# Altium PCB PCB Módulo Gasolina.PcbDoc
Units mm, origin at the board's own origin, x right, y up, seen from the top; angles counter-clockwise.
Board outline 19.15 x 81.74 mm, 2 copper layers (Top Layer, Bottom Layer); 54 components, 26 nets, 167 pads, 29 vias.
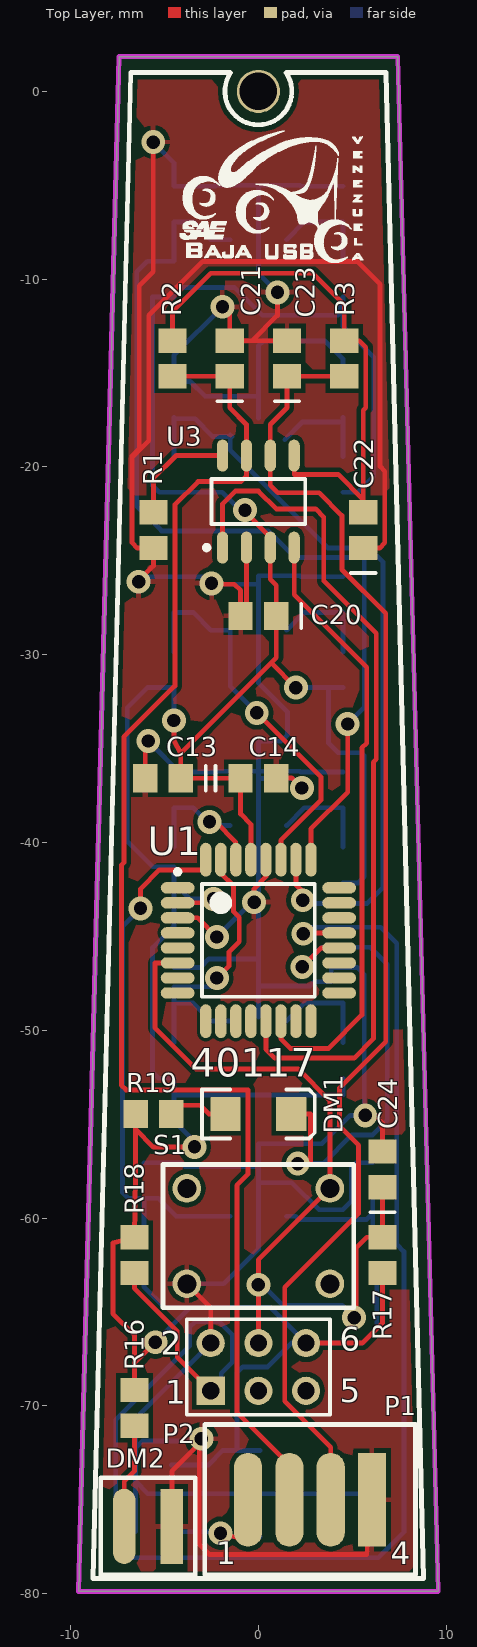
[diagram p0: Top Layer view]
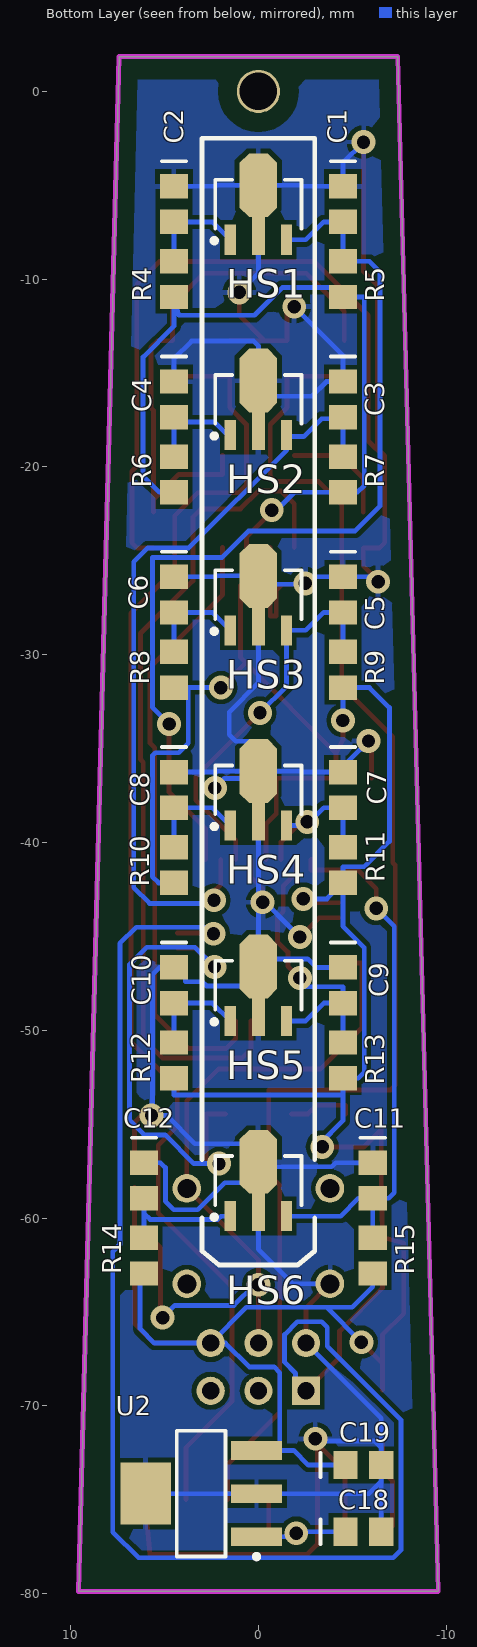
[diagram p1: Bottom Layer view, seen from below]

## Layer stack, top to bottom
Top Layer: signal copper 0.0356
Dielectric: dielectric 0.32, FR-4, Dk 4.8
Bottom Layer: signal copper 0.0356

## Board outline
-9.576,-79.883 9.576,-79.883 7.417,1.854 -7.417,1.854

## Design rules (kind name [scope] priority, off if disabled: settings)
Clearance "Clearance Micro" [(HasFootprint('873-01_M'))] p1: gap=0.178
Clearance [All] p2: gap=0.254
PolygonConnect [All] p1: connectstyle=Relief reliefconductorwidth=0.254 reliefentries=4 polygonreliefangle="90 Angle"
RoutingVias [All] p1: holewidth=0.711 width=1.27 viastyle="Through Hole" minholewidth=0.711 minwidth=1.27 maxholewidth=0.711 maxwidth=1.27
SilkscreenOverComponentPads [All] p1: minsilkscreentomaskgap=0.178
SolderMaskExpansion [All] p1: expansion=0.102
Width [All] p1: maxlimit=0.254 minlimit=0.254 preferedwidth=0.254
27 further rules are at their usual default settings.

## Components (designator, comment, footprint, x,y, rotation, side; value= is the part's Value field where it differs from the comment)
C1 "Cap Semi" C0805 -4.5,-6 r270 bottom
C2 "Cap Semi" C0805 4.5,-6 r270 bottom
C3 "Cap Semi" C0805 -4.5,-16.4 r270 bottom
C4 "Cap Semi" C0805 4.5,-16.4 r270 bottom
C5 "Cap Semi" C0805 -4.5,-26.8 r270 bottom
C6 "Cap Semi" C0805 4.5,-26.8 r270 bottom
C7 "Cap Semi" C0805 -4.5,-37.2 r270 bottom
C8 "Cap Semi" C0805 4.5,-37.2 r270 bottom
C9 "Cap Semi" C0805 -4.5,-47.6 r270 bottom
C10 "Cap Semi" C0805 4.5,-47.6 r270 bottom
C11 "Cap Semi" C0805 -6.092,-58 r270 bottom
C12 "Cap Semi" C0805 6.092,-58 r270 bottom
C13 "Cap Pol3" C0805 -5.08,-36.576 r180 top
C14 "Cap Pol3" C0805 0,-36.576 r0 top
C18 "Cap Pol3" C0805 -5.588,-76.708 r180 bottom
C19 "Cap Pol3" C0805 -5.588,-73.152 r180 bottom
C20 "Cap Pol3" C0805 0,-27.94 r180 top
C21 "Cap Pol3" C0805 -1.524,-14.224 r90 top
C22 "Cap Pol3" C0805 5.588,-23.368 r90 top
C23 "Cap Pol3" C0805 1.524,-14.224 r90 top
C24 "Cap Pol3" C0805 6.604,-57.404 r90 top
DM1 "LED2" "LED SMD" 0,-54.356 r180 top
DM2 "LED2" "SMD pads LED" -5.876,-76.416 r0 top
HS1 "Component_1" SOT89M 0,-6 r90 bottom
HS2 "Component_1" SOT89M 0,-16.4 r90 bottom
HS3 "Component_1" SOT89M 0,-26.8 r90 bottom
HS4 "Component_1" SOT89M 0,-37.2 r90 bottom
HS5 "Component_1" SOT89M 0,-47.6 r90 bottom
HS6 "Component_1" SOT89M 0,-58 r90 bottom
P1 "Header 4" "CONECTOR CABLES 4" 7.15,-75 r0 top
P2 "Header 3X2" "HDR2X3 mod" -2.54,-69.2 r0 top
R1 "Res Semi" 2012[0805] -5.588,-23.368 r90 top
R2 "Res Semi" 2012[0805] -4.572,-14.224 r270 top
R3 "Res Semi" 2012[0805] 4.572,-14.224 r90 top
R4 "Res Semi" 2012[0805] 4.5,-10 r270 bottom
R5 "Res Semi" 2012[0805] -4.5,-10 r270 bottom
R6 "Res Semi" 2012[0805] 4.5,-20.4 r270 bottom
R7 "Res Semi" 2012[0805] -4.5,-20.4 r270 bottom
R8 "Res Semi" 2012[0805] 4.5,-30.8 r270 bottom
R9 "Res Semi" 2012[0805] -4.5,-30.8 r270 bottom
R10 "Res Semi" 2012[0805] 4.5,-41.2 r270 bottom
R11 "Res Semi" 2012[0805] -4.5,-41.2 r270 bottom
R12 "Res Semi" 2012[0805] 4.5,-51.6 r270 bottom
R13 "Res Semi" 2012[0805] -4.5,-51.6 r270 bottom
R14 "Res Semi" 2012[0805] 6.092,-62 r270 bottom
R15 "Res Semi" 2012[0805] -6.092,-62 r270 bottom
R16 "Res Semi" 2012[0805] -6.604,-70.104 r270 top
R17 "Res Semi" 2012[0805] 6.604,-61.976 r270 top
R18 "Res Semi" 2012[0805] -6.604,-61.976 r90 top
R19 "Res Semi" 2012[0805] -5.588,-54.456 r180 top
S1 "SW-PB" Boton -3.81,-58.42 r0 top
U1 "MC9S08DZ60_32" 873-01_M 0,-45.212 r0 top
U2 "MIC2954-03WS TR" SOT223-4M 3.048,-74.676 r0 bottom
U3 "TJA1040" SOT96-1_L 0,-21.844 r90 top

## Footprints (in the part's own frame and the unit in brackets; to place one, negate y for a bottom-side part, rotate by r counter-clockwise, add the part's x,y. Pads: shape width x height; smd on the part's side, far side on the other; paste and mask are expansions set on the pad)
873-01_M [mm]
  oval 1.8x0.6 smd: 1(-4.3,2.8) 2(-4.3,2) 3(-4.3,1.2) 4(-4.3,0.4) 5(-4.3,-0.4) 6(-4.3,-1.2) 7(-4.3,-2) 8(-4.3,-2.8) 17(4.3,-2.8) 18(4.3,-2) 19(4.3,-1.2) 20(4.3,-0.4) 21(4.3,0.4) 22(4.3,1.2) 23(4.3,2) 24(4.3,2.8)
  oval 0.6x1.8 smd: 9(-2.8,-4.3) 10(-2,-4.3) 11(-1.2,-4.3) 12(-0.4,-4.3) 13(0.4,-4.3) 14(1.2,-4.3) 15(2,-4.3) 16(2.8,-4.3) 25(2.8,4.3) 26(2,4.3) 27(1.2,4.3) 28(0.4,4.3) 29(-0.4,4.3) 30(-1.2,4.3) 31(-2,4.3) 32(-2.8,4.3)
  silkscreen extent -4.42,-3 3,3.77, body extent -3.51,-3.51 3.51,3.51, height 1.6
2012[0805] [mm]
  rect 1.3x1.5 smd: 1(-0.95,0) 2(0.95,0)
Boton [mil]
  round 60 hole 40: 0(0,0) 1(300,0) 2(0,-200) 3(300,-200)
  silkscreen extent -50,-250 350,50
C0805 [mm]
  rect 1.3x1.5 smd: 1(-0.95,0) 2(0.95,0)
  silkscreen extent -2.28,-0.65 -2.28,0.65
"CONECTOR CABLES 4" [mm] "Conector de 4 pads para cables que salen del módulo"
  oval 1.5x5 smd: 1(-7.7,0) 2(-5.5,0) 3(-3.3,0)
  rect 1.5x5 smd: 4(-1.1,0)
  silkscreen extent -10,-4 1.22,4
"HDR2X3 mod" [mm]
  rect 1.5x1.5 hole 0.914: 1(0,0)
  round 1.5 hole 0.914: 2(0,2.54) 3(2.54,0) 4(2.54,2.54) 5(5.08,0) 6(5.08,2.54)
  silkscreen extent -1.27,-1.27 6.35,3.81
"LED SMD" [mm] "5.0x1.5mm"
  rect 1.6x1.8 smd: 1(1.75,0.1) 2(-1.75,0.1)
  silkscreen extent -3,-1.2 3,1.4
"SMD pads LED" [mm] "Pads SMD para un LED trough-hole"
  oval 1.2x4 smd: 1(-1.27,0)
  rect 1.2x4 smd: 2(1.27,0)
  silkscreen extent -2.51,-2.59 2.51,2.59
SOT89M [mm] "SOT89, 3-Leads, Body 4.5x2.4 mm, Pitch 1.5mm, Lead Span 4.1mm, IPC Low Density"
  rect 1.6x0.6 smd: 1(-1.9,1.5) 3(-1.9,-1.5)
  rect 2x0.7 smd: 2(-1.7,0)
  oct 3.4x2 smd: 2(1,0)
  silkscreen extent -2.07,-2.3 1.3,2.48, body extent -1.3,-2.3 1.3,2.3, height 1.6
SOT96-1_L [mm]
  oval 1.7x0.6 smd: 1(-2.45,1.905) 2(-2.45,0.635) 3(-2.45,-0.635) 4(-2.45,-1.905) 5(2.45,-1.905) 6(2.45,-0.635) 7(2.45,0.635) 8(2.45,1.905)
  silkscreen extent -2.57,-2.5 1.2,2.88, body extent -2,-2.5 2,2.5, height 1.75
SOT223-4M [mm] "SOT223, 4-Leads, Body 6.5x3.5mm, Pitch 2.3mm, Lead Span 7mm, IPC Low Density"
  rect 2.7x1 smd: 1(-2.95,2.3) 2(-2.95,0) 3(-2.95,-2.3)
  rect 2.7x3.3 smd: 4(2.95,0)
  silkscreen extent -3.07,-3.35 1.3,3.47, body extent -1.85,-3.35 1.85,3.35, height 1.8

## Part data
C1 C2 C3 C4 C5 C6 C7 C8 C9 C10 C11 C12: "Capacitor (Semiconductor SIM Model)"
C13 C14 C18 C19 C20 C21 C22 C23 C24: "Polarized Capacitor (Surface Mount)"
DM1 DM2: "Typical RED, GREEN, YELLOW, AMBER GaAs LED"
P1: "Header, 4-Pin"
P2: "Header, 3-Pin, Dual row"
R1 R2 R3 R4 R5 R6 R7 R8 R9 R10 R11 R12 R13 R14 R15 R16 R17 R18 R19: "Semiconductor Resistor"
S1: "Switch"
U2: library part Component_1_1

## Free pads (board coordinates)
  round 2.3 hole 2: 1(0,0)

## Via types
v1: diameter 1.27, hole 0.711, Top Layer to Bottom Layer, 29 vias

## Nets (pads, with @x,y where several pads share a name; then routed paths per layer and width w, separated by ;. In a path a pad name is that pad's centre, name@x,y a point inside that pad or via, vN(x,y) a via of type N, cw(c..) or ccw(c..) an arc to the next point about the centre after c; other vN are vias at no path point)
+5V: C13.1 C14.1 C19.1 C20.1 P2.6 R4.2 R5.2 R6.2 R7.2 R8.2 R9.2 R10.2 R11.2 R12.2 R13.2 R14.2 R15.2 R16.1 R17.2 R18.2 R19.2 U1.2 U1.29 U2.3 U3.3 | length 192.8
  Top Layer w0.254: R16.1 -6.604,-66.224 -7.743,-65.085 -7.743,-61.331 R18.2 -6.538,-57.73 -6.538,-55.281 ; -6.604,-67.731 v1(-5.482,-66.609) ; R19.2 -6.538,-55.281 ; v1(-4.5,-33.5) -4.5,-34.543 -4.13,-35.24 ; U1.2 -2.597,-43.212 v1(-2.388,-43.002) ; v1(-3.404,-56.21) -3.105,-56.21 -3.255,-56.061 -3.414,-56.221 -5.598,-56.221 -6.538,-55.281 ; v1@-0.885,-22.617 -0.885,-22.388 -0.798,-22.301 v1(-0.711,-22.301) ; v1@-0.755,-22.345 0.635,-23.734 U3.3 0.635,-25.985 0.95,-26.3 C20.1 0.95,-30.16 0.678,-30.432 ; U1.29 -0.4,-39.025 -0.95,-38.475 C14.1 -2.561,-36.576 C13.1 -4.13,-35.24 ; v1(1.996,-31.75) 0.678,-30.432 ; P2.6 5.537,-66.66 6.604,-65.593 R17.2 ; -4.13,-35.24 0.678,-30.432
  Bottom Layer w0.254: R15.2 -6.092,-63.663 -5,-64.755 -3.628,-64.755 ; v1(-5.482,-66.609) -3.628,-64.755 ; C19.1 -2.663,-73.152 -1.887,-72.376 U2.3@-1.139,-72.376 ; -4.5,-53.452 4.5,-53.452 R12.2 ; v1(-4.5,-33.5) R9.2 -5.914,-31.75 -6.981,-32.817 -6.981,-39.939 -5.635,-41.286 -4.5,-41.286 R11.2 ; v1(-3.404,-56.21) -3.255,-56.061 -4.5,-54.816 R13.2 -5.318,-52.55 -5.635,-52.233 -5.635,-45.597 -4.5,-44.462 R11.2 ; v1(-2.388,-43.002) -3.648,-43.002 R11.2 ; v1(-0.711,-22.301) -0.798,-22.301 -0.885,-22.388 -1.923,-21.35 R7.2 -5.276,-21.35 -5.635,-20.991 -5.635,-10.95 R5.2 -4.5,-10.45 -1.266,-10.45 0.207,-11.923 4.246,-11.923 R4.2 4.5,-12.508 6.139,-14.147 6.139,-20.495 5.284,-21.35 R6.2 ; U2.3 U2.3@-1.139,-72.376 ; v1(1.996,-31.75) 3.738,-31.75 ; R10.2 5.312,-42.15 5.643,-41.819 5.643,-35.367 5.49,-35.215 4.246,-35.215 3.738,-34.707 3.738,-31.75 ; R8.2 3.738,-31.75 ; R14.2@6.3,-63.158 6.3,-65.9 5.54,-66.66 P2.6 ; -3.628,-64.755 0.635,-64.755 P2.6 ; U2.3@-1.139,-72.376 -1.139,-68.235 -0.834,-67.93 0.487,-67.93 1.757,-66.66 P2.6
+12V: C18.1 P1.1 U2.1 | length 10.7
  Top Layer w0.254: v1(-2.015,-76.782) -1.095,-77.029 -0.55,-77.176 P1.1
  Bottom Layer w0.254: C18.1 -2.409,-76.708 -2.175,-76.942 -2.141,-76.976 -2.015,-76.976 -1.294,-76.976 ; v1(-2.015,-76.782) -1.294,-76.976 ; -1.294,-76.976 U2.1 -1.294,-76.976
BKGD: P2.1 R18.1 U1.21 | length 84.2
  Top Layer w0.254: R18.1 -6.604,-63.736 -4.324,-66.016 -4.324,-67.416 P2.1 ; v1@2.388,-45.212 2.388,-44.806 2.458,-44.735 2.534,-44.735 2.667,-44.602 2.667,-44.515 2.671,-44.511 2.671,-44.812 U1.21
  Bottom Layer w0.254: P2.1 -1.977,-69.2 -1.977,-68.26 -1.393,-67.676 -1.393,-66.203 -2.079,-65.517 -3.374,-65.517 -3.671,-65.814 -3.671,-66.83 -7.591,-70.75 -7.591,-77.684 -7.184,-78.09 6.379,-78.09 7.751,-76.719 7.751,-61.783 7.37,-61.402 7.37,-45.375 6.506,-44.511 2.671,-44.511 2.667,-44.515 2.667,-44.602 2.534,-44.735 2.458,-44.735 2.388,-44.806 v1@2.388,-45.212
  other v1: 2.388,-44.856
CANHIGH: C21.1 P1.2 R2.2 U3.7 | length 75.3
  Top Layer w0.254: R2.2 -3.069,-15.174 C21.1 -1.524,-16.851 -0.635,-17.74 U3.7 -0.635,-20.483 -0.929,-20.777 -3.211,-20.777 -4.441,-22.007 -4.441,-31.659 -7.159,-34.377 -7.159,-41.068 -7.292,-41.201 -7.292,-52.925 -7.044,-53.173 -0.555,-53.173 -0.555,-57.669 -1.139,-58.253 -1.139,-70.343 1.65,-73.132 P1.2
CANLOW: C23.1 P1.3 R3.1 U3.6 | length 71.2
  Top Layer w0.254: P1.3 3.85,-72.208 1.401,-69.759 1.401,-63.688 5.338,-59.751 5.338,-56.119 4.322,-55.103 4.322,-53.071 6.786,-50.607 6.786,-27.798 4.449,-25.461 4.449,-22.591 3.23,-21.372 1.041,-21.372 0.635,-20.966 U3.6 0.635,-17.74 1.524,-16.851 C23.1 R3.1
GND: C1.1 C2.1 C3.1 C4.1 C5.1 C6.1 C7.1 C8.1 C9.1 C10.1 C11.1 C12.1 C13.2 C14.2 C18.2 C19.2 C20.2 C21.2 C22.1 C23.2 C24.2 DM2.2 HS1.2 HS2.2 HS3.2 HS4.2 HS5.2 HS6.2 P1.4 P2.2 R1.1 S1.2 U1.3 U1.28 U2.2 U2.4 U3.2 | length 285.6
  Top Layer w0.254: v1(-6.375,-26.111) -6.375,-26.057 -5.588,-25.27 R1.1 -6.448,-24.318 -6.727,-24.039 -6.727,-19.492 ; C13.2 -6.03,-35.102 -5.867,-34.939 v1(-5.867,-34.595) ; v1(-5.6,-2.7) -5.6,-9.602 -6.346,-10.348 -6.346,-19.035 -6.727,-19.416 -6.727,-19.492 ; DM2.2 -4.606,-73.48 v1@-3.147,-72.021 ; U1.3 -3.232,-44.012 v1(-2.21,-45.034) ; S1.2 -2.54,-64.77 P2.2 ; v1(-3.035,-71.755) -3.147,-71.867 v1@-3.147,-72.021 ; v1@-2.5,-26.249 -1.28,-26.249 -0.95,-26.579 C20.2 -0.64,-27.94 -0.635,-27.935 U3.2 ; v1(-1.909,-11.466) -1.524,-11.851 C21.2 -0.326,-13.274 ; v1@-0.229,-42.806 v1(-0.229,-43.18) -0.229,-42.458 0.4,-41.829 U1.28 ; C14.2 0.95,-36.561 1.782,-36.561 v1(2.315,-37.095) ; v1(1.016,-10.704) 1.016,-11.932 -0.326,-13.274 ; C23.2 -0.326,-13.274 ; C22.1 6.456,-24.318 6.735,-24.039 6.735,-20.229 6.481,-19.975 6.481,-10.272 5.262,-9.053 -2.968,-9.053 -5.838,-11.923 -5.838,-18.603 -6.727,-19.492 ; v1(5.69,-54.534) 5.69,-54.167 6.056,-54.534 6.216,-54.534 6.604,-54.921 C24.2 ; P1.4 5.772,-77.911 -2.614,-77.911 -3.147,-77.379 v1@-3.147,-72.021
  Bottom Layer w0.254: C18.2 -6.538,-74.027 ; v1(-6.375,-26.111) -6.375,-26.057 -6.168,-25.85 C5.1 -2.55,-25.85 v1@-2.5,-25.8 ; C11.1 -4.115,-57.05 -3.904,-57.261 HS6.2@0,-57.261 ; v1(-5.867,-34.595) -5.867,-34.939 -5.965,-35.037 -5.425,-35.037 -4.5,-35.962 C7.1 -2.282,-36.25 -2.232,-36.2 HS4.2@0,-36.2 ; v1(-5.6,-2.7) -4.5,-3.8 C1.1 -2.282,-5.05 -2.232,-5 HS1.2@0,-5 ; C9.1 -3.078,-46.65 -2.631,-46.203 HS5.2@-0.025,-46.203 ; S1.2 -1.84,-63.5 0,-61.66 0,-59.7 HS6.2@0,-58.072 ; v1@-3.147,-72.021 -3.3,-71.867 -6.168,-71.867 -6.538,-72.237 ; P2.2 -6.538,-70.658 -6.538,-72.237 ; v1@-2.5,-26.249 HS3.2@0,-26.249 ; v1(-1.909,-11.466) -4.5,-14.057 C3.1 -3.628,-15.45 -2.837,-16.241 HS2.2@0,-16.241 ; v1@-1.781,-44.606 -0.229,-43.053 v1@-0.229,-42.806 ; HS5.2@0,-49.3 0,-46.6 0,-38.9 HS4.2@0,-36.587 ; HS2.2@0,-17.4 HS2.2@0,-16.241 ; HS5.2@0.076,-47.639 2.758,-47.639 2.984,-47.414 3.877,-47.414 3.877,-46.65 C10.1 5.262,-46.65 5.643,-47.031 5.643,-54.087 5.77,-54.087 5.69,-54.167 v1(5.69,-54.534) 4.891,-54.534 3.382,-56.043 0,-56.043 HS6.2@0,-58.072 ; v1(1.016,-10.704) 0,-9.688 0,-7.7 HS1.2@0,-5 ; v1(2.315,-37.095) 1.807,-36.587 HS4.2@0,-36.587 ; C8.1 2.264,-36.25 2.214,-36.2 HS4.2@0,-36.2 ; C6.1 2.264,-25.85 2.214,-25.8 0,-25.8 HS3.2@0,-26.249 ; C4.1 4.5,-14.235 3.56,-13.295 0.254,-13.295 0,-13.549 HS2.2@0,-16.241 ; C2.1 2.264,-5.05 2.214,-5 HS1.2@0,-5 ; U2.4 U2.2 -5.889,-74.676 -6.538,-74.027 ; C12.1 5.216,-57.05 4.953,-57.313 4.953,-59.11 4.5,-59.563 3.23,-59.563 1.783,-58.116 0.044,-58.116 HS6.2@0,-58.072 ; -6.538,-74.027 C19.2 -6.538,-72.237 ; HS4.2@0,-36.587 HS4.2@0,-36.2 ; HS4.2@0,-36.2 0,-34.605 1.198,-34.605 1.553,-34.25 1.553,-33.056 0,-31.503 0,-28.5 HS3.2@0,-26.249
  other v1: -2.5,-26.2
NetC2_2: C2.2 HS1.1 R4.1 | length 5.5
  Bottom Layer w0.254: HS1.1 2.45,-6.95 C2.2 4.5,-8.011 R4.1
NetC4_2: C4.2 HS2.1 R6.1 | length 5.5
  Bottom Layer w0.254: HS2.1@1.4,-18.55 2.35,-17.6 C4.2@4.4,-17.6 ; R6.1 C4.2
NetC6_2: C6.2 HS3.1 R8.1 | length 5.5
  Bottom Layer w0.254: HS3.1 2.45,-27.75 C6.2 4.5,-28.814 R8.1
NetC8_2: C8.2 HS4.1 R10.1 | length 5.5
  Bottom Layer w0.254: HS4.1 2.45,-38.15 C8.2 4.5,-39.203 R10.1
NetC10_2: C10.2 HS5.1 R12.1 | length 5.5
  Bottom Layer w0.254: HS5.1 2.45,-48.55 C10.2 4.5,-49.617 R12.1
NetC12_2: C12.2 HS6.1 R14.1 | length 7.7
  Bottom Layer w0.254: HS6.1 1.988,-59.9 2.159,-60.071 5.77,-60.071 6.092,-59.749 ; R14.1 6.092,-60.005 6.092,-59.749 ; 6.092,-59.749 C12.2 6.092,-59.749
NetC22_2: C22.2 R2.1 R3.2 U3.5 | length 30.2
  Top Layer w0.254: R2.1 -4.572,-11.72 -2.54,-9.688 2.9,-9.688 4.572,-11.36 R3.2 5.368,-13.274 5.719,-13.625 5.719,-16.851 5.588,-16.982 5.588,-21.738 ; U3.5 1.905,-20.396 4.246,-20.396 5.588,-21.738 ; 5.588,-21.738 C22.2 5.588,-21.738
NetDM1_1: DM1.1 R19.1 | length 3.5
  Top Layer w0.254: R19.1 -4.638,-53.998 -3.099,-53.998 -2.641,-54.456 DM1.1
NetDM1_2: DM1.2 U1.20 | length 26.1
  Top Layer w0.254: DM1.2 2.773,-54.456 2.773,-57.059 2.731,-57.1 v1(2.1,-57.1) ; v1(2.337,-46.623) 3.348,-45.612 U1.20
  Bottom Layer w0.254: v1(2.1,-57.1) 3.443,-57.1 4.97,-55.573 6.087,-55.573 6.862,-54.798 6.862,-46.493 5.948,-45.578 3.382,-45.578 v1(2.337,-46.623)
NetDM2_1: DM2.1 R16.2 | length 5.6
  Top Layer w0.254: DM2.1 -7.146,-74.026 -6.604,-73.484 R16.2
NetR1_2: R1.2 U3.8 | length 6
  Top Layer w0.254: R1.2 -5.588,-20.61 -4.369,-19.391 -1.905,-19.391 U3.8
PROX_GAS1: C1.2 HS1.3 R5.1 U1.25 | length 50.7
  Top Layer w0.254: U1.25 2.8,-39.279 4.754,-37.325 v1(4.754,-33.691)
  Bottom Layer w0.254: HS1.3 -2.526,-7.9 -3.476,-6.95 C1.2 -4.5,-8.011 R5.1 -5.914,-9.05 -6.473,-9.609 -6.473,-22.083 -5.152,-23.404 0.519,-23.404 1.934,-24.819 5.643,-24.819 5.643,-32.802 v1(4.754,-33.691)
PROX_GAS2: C3.2 HS2.3 R7.1 U1.26 | length 41.9
  Top Layer w0.254: U1.26 2,-42.24 2.392,-42.632 2.362,-42.661 v1(2.362,-43.078)
  Bottom Layer w0.254: R7.1 -4.5,-18.4 C3.2 ; C3.2@-4.392,-17.432 -3.368,-17.432 -2.418,-18.382 HS2.3@-1.392,-18.382 ; HS2.3 -1.5,-19.106 3.705,-24.311 5.889,-24.311 6.633,-25.055 6.633,-42.403 5.795,-43.241 3.001,-43.241 2.392,-42.632 2.362,-42.661 v1(2.362,-43.078)
PROX_GAS3: C5.2 HS3.3 R9.1 U1.27 | length 20.6
  Top Layer w0.254: v1(-0.083,-33.096) 3.331,-36.51 3.331,-37.755 1.2,-39.886 U1.27
  Bottom Layer w0.254: R9.1 -4.5,-28.814 C5.2 -3.476,-27.75 -2.526,-28.7 HS3.3 -1.5,-31.679 v1(-0.083,-33.096)
PROX_GAS4: C7.2 HS4.3 R11.1 U1.30 | length 8.3
  Top Layer w0.254: v1(-2.6,-38.9) -2.28,-38.9 -1.2,-39.98 U1.30
  Bottom Layer w0.254: R11.1 -4.5,-39.203 C7.2 -3.476,-38.15 -2.726,-38.9 v1(-2.6,-38.9) -2.4,-39.1 HS4.3
PROX_GAS5: C9.2 HS5.3 R13.1 U1.31 | length 16.8
  Top Layer w0.254: v1@-2,-47.681 -2.21,-47.471 v1(-2.21,-47.219) -1.571,-46.58 -1.571,-45.832 -1.016,-45.277 -1.016,-43.993 -1.321,-43.688 -1.321,-42.316 -2,-41.637 U1.31
  Bottom Layer w0.254: R13.1 -4.5,-49.393 C9.2 ; v1(-2.21,-47.219) -2.21,-47.471 -2.42,-47.681 -4.5,-47.681 C9.2 ; HS5.3 -2.526,-49.5 -3.476,-48.55 C9.2
PROX_GAS6: C11.2 HS6.3 R15.1 U1.32 | length 29.4
  Top Layer w0.254: v1(-6.274,-43.51) -6.274,-42.458 -5.279,-41.463 -2.8,-41.463 U1.32
  Bottom Layer w0.254: v1(-6.274,-43.51) -7.235,-44.471 -7.235,-58.645 -6.93,-58.95 C11.2 ; R15.1 -6.092,-60.005 C11.2 ; HS6.3 -4.38,-59.9 -5.33,-58.95 C11.2
RST_BDM: C24.1 P2.4 R17.1 S1.1 U1.6 | length 44.5
  Top Layer w0.254: U1.6 -5.508,-46.412 -5.508,-49.871 -3.323,-52.055 2.112,-52.055 3.81,-53.753 S1.1 0,-62.23 P2.4 P2.4@0.385,-66.275 ; v1@5.211,-65.3 5.211,-61.585 5.77,-61.026 R17.1 6.604,-59.701 C24.1
  Bottom Layer w0.254: v1(0,-63.551) 0.197,-63.551 1.299,-64.654 4.454,-64.654 v1(5.1,-65.3)
RXCAN: U1.14 U3.4 | length 32.8
  Top Layer w0.254: U1.14 1.2,-50.455 1.708,-50.963 3.738,-50.963 5.516,-49.185 5.516,-34.961 5.77,-34.707 5.77,-30.672 1.905,-26.808 U3.4
TXCAN: U1.13 U3.1 | length 45.4
  Top Layer w0.254: U3.1 -1.905,-21.97 -1.22,-21.285 0.005,-21.285 0.955,-22.236 3.052,-22.236 3.484,-22.667 3.484,-26.071 6.278,-28.865 6.278,-35.571 6.125,-35.723 6.125,-50.455 5.103,-51.477 0.874,-51.477 0.4,-51.004 U1.13
pads on no net: P2.3 P2.5 S1.0 S1.3 U1.1 U1.4 U1.5 U1.7 U1.8 U1.9 U1.10 U1.11 U1.12 U1.15 U1.16 U1.17 U1.18 U1.19 U1.22 U1.23 U1.24

## Polygon pours and split planes (outlines as drawn)
GND on Top Layer "GND plane top" (solid, pour order 1000): -6.8,1 6.8,1 6.8,-3.543 6.916,-3.659 7.04,-3.782 7.04,-8.62 7.04,-14.783 7.198,-14.941 7.292,-15.035 7.292,-18.717 7.292,-23.754 7.421,-23.883 7.646,-24.108 7.646,-32.911 7.646,-38.378 7.785,-38.518 7.962,-38.694 7.962,-45.591 7.962,-53.033 8.152,-53.223 8.347,-53.419 8.347,-61.052 8.347,-67.722 8.518,-67.893 8.647,-68.021 8.647,-73.058 8.647,-79.047 8.8,-79.2 -8.8,-79.2 -8.8,-70.96 -8.589,-70.749 -8.488,-70.648 -8.488,-66.695 -8.488,-60.943 -8.341,-60.796 -8.223,-60.678 -8.223,-56.066 -8.223,-53.114 -8.148,-53.038 -8.043,-52.934 -8.043,-48.849 -8.043,-45.215 -7.95,-45.122 -7.865,-45.037 -7.865,-41.711 -7.865,-38.702 -7.788,-38.625 -7.694,-38.531 -7.694,-34.852 -7.694,-32.375 -7.631,-32.312 -7.514,-32.195 -7.514,-27.63 -7.514,-23.81 -7.416,-23.712 -7.245,-23.541 -7.245,-16.859 -7.245,-11.529 -7.109,-11.393 -6.999,-11.283 -6.999,-6.997 -6.999,-3.92 -6.921,-3.841 -6.855,-3.775 -6.855,-1.192 -6.855,0.945 -6.8,1
GND on Bottom Layer "GND plane bottom" (solid, pour order 1001): 6.8,1 -6.8,1 -6.8,-4.741 -6.947,-4.888 -7.11,-5.051 -7.11,-11.434 -7.11,-18.1 -7.281,-18.27 -7.481,-18.47 -7.481,-26.294 -7.481,-38.815 -7.801,-39.135 -8.096,-39.43 -8.096,-50.957 -8.096,-56.703 -8.243,-56.85 -8.473,-57.081 -8.473,-66.105 -8.473,-71.855 -8.62,-72.002 -8.8,-72.182 -8.8,-79.2 8.8,-79.2 8.591,-78.991 8.591,-70.808 8.591,-64.319 8.425,-64.153 8.351,-64.079 8.351,-61.189 8.351,-53.648 8.158,-53.455 8.04,-53.337 8.04,-48.714 8.04,-44.339 7.928,-44.227 7.746,-44.045 7.746,-36.926 7.746,-31.605 7.61,-31.469 7.439,-31.298 7.439,-24.631 7.439,-19.237 7.301,-19.099 7.099,-18.897 7.099,-11.001 7.099,-5.855 6.968,-5.723 6.8,-5.555 6.8,1

## Keep-outs
Top Overlay:
  lines w0.254: -1.5,1 -6.8,1 -8.8,-79.2 8.8,-79.2 6.8,1 1.5,1 ; -1.478,0.997 ccw(c0,0) 1.478,0.997
Keep-Out Layer:
  the board outline again, w0.254

## Silkscreen, mask and mechanical layers (free items; w line width, h text height)
Top Overlay:
  drawing of 1595 lines, arcs and shapes, not listed
  text "40117" at -3.607,-52.476 h1.52
Bottom Overlay:
  lines w0.254: -3,-60 -3,-61.75 -2.1,-62.5 2.1,-62.5 3,-61.75 3,-60 ; -3,-56.9 -3,-2.5 3,-2.5 3,-56.9

## Dimensions
8.357,2.007 to 9.576,-79.883 on Mechanical 13
-7.417,1.854 to 7.544,2.337 on Mechanical 13
-9.703,-80.315 to 9.703,-80.34 on Mechanical 13

## Text inside footprints (layer, text, board x,y; h text height)
P1: Top Overlay "4" at 7.046,-78.424 h1.2; Top Overlay "1" at -2.254,-78.424 h1.2
P2: Top Overlay "6" at 4.324,-67.072 h1.27; Top Overlay "5" at 4.324,-69.797 h1.27; Top Overlay "2" at -5.201,-67.272 h1.27; Top Overlay "1" at -4.951,-69.897 h1.27